# Altium PCB PCB6.PcbDoc
Units mm, origin at the board's own origin, x right, y up, seen from the top; angles counter-clockwise.
Board outline 62.8 x 34.79 mm, 2 copper layers (Top Layer, Bottom Layer); 14 components, 12 nets, 43 pads, 4 vias.
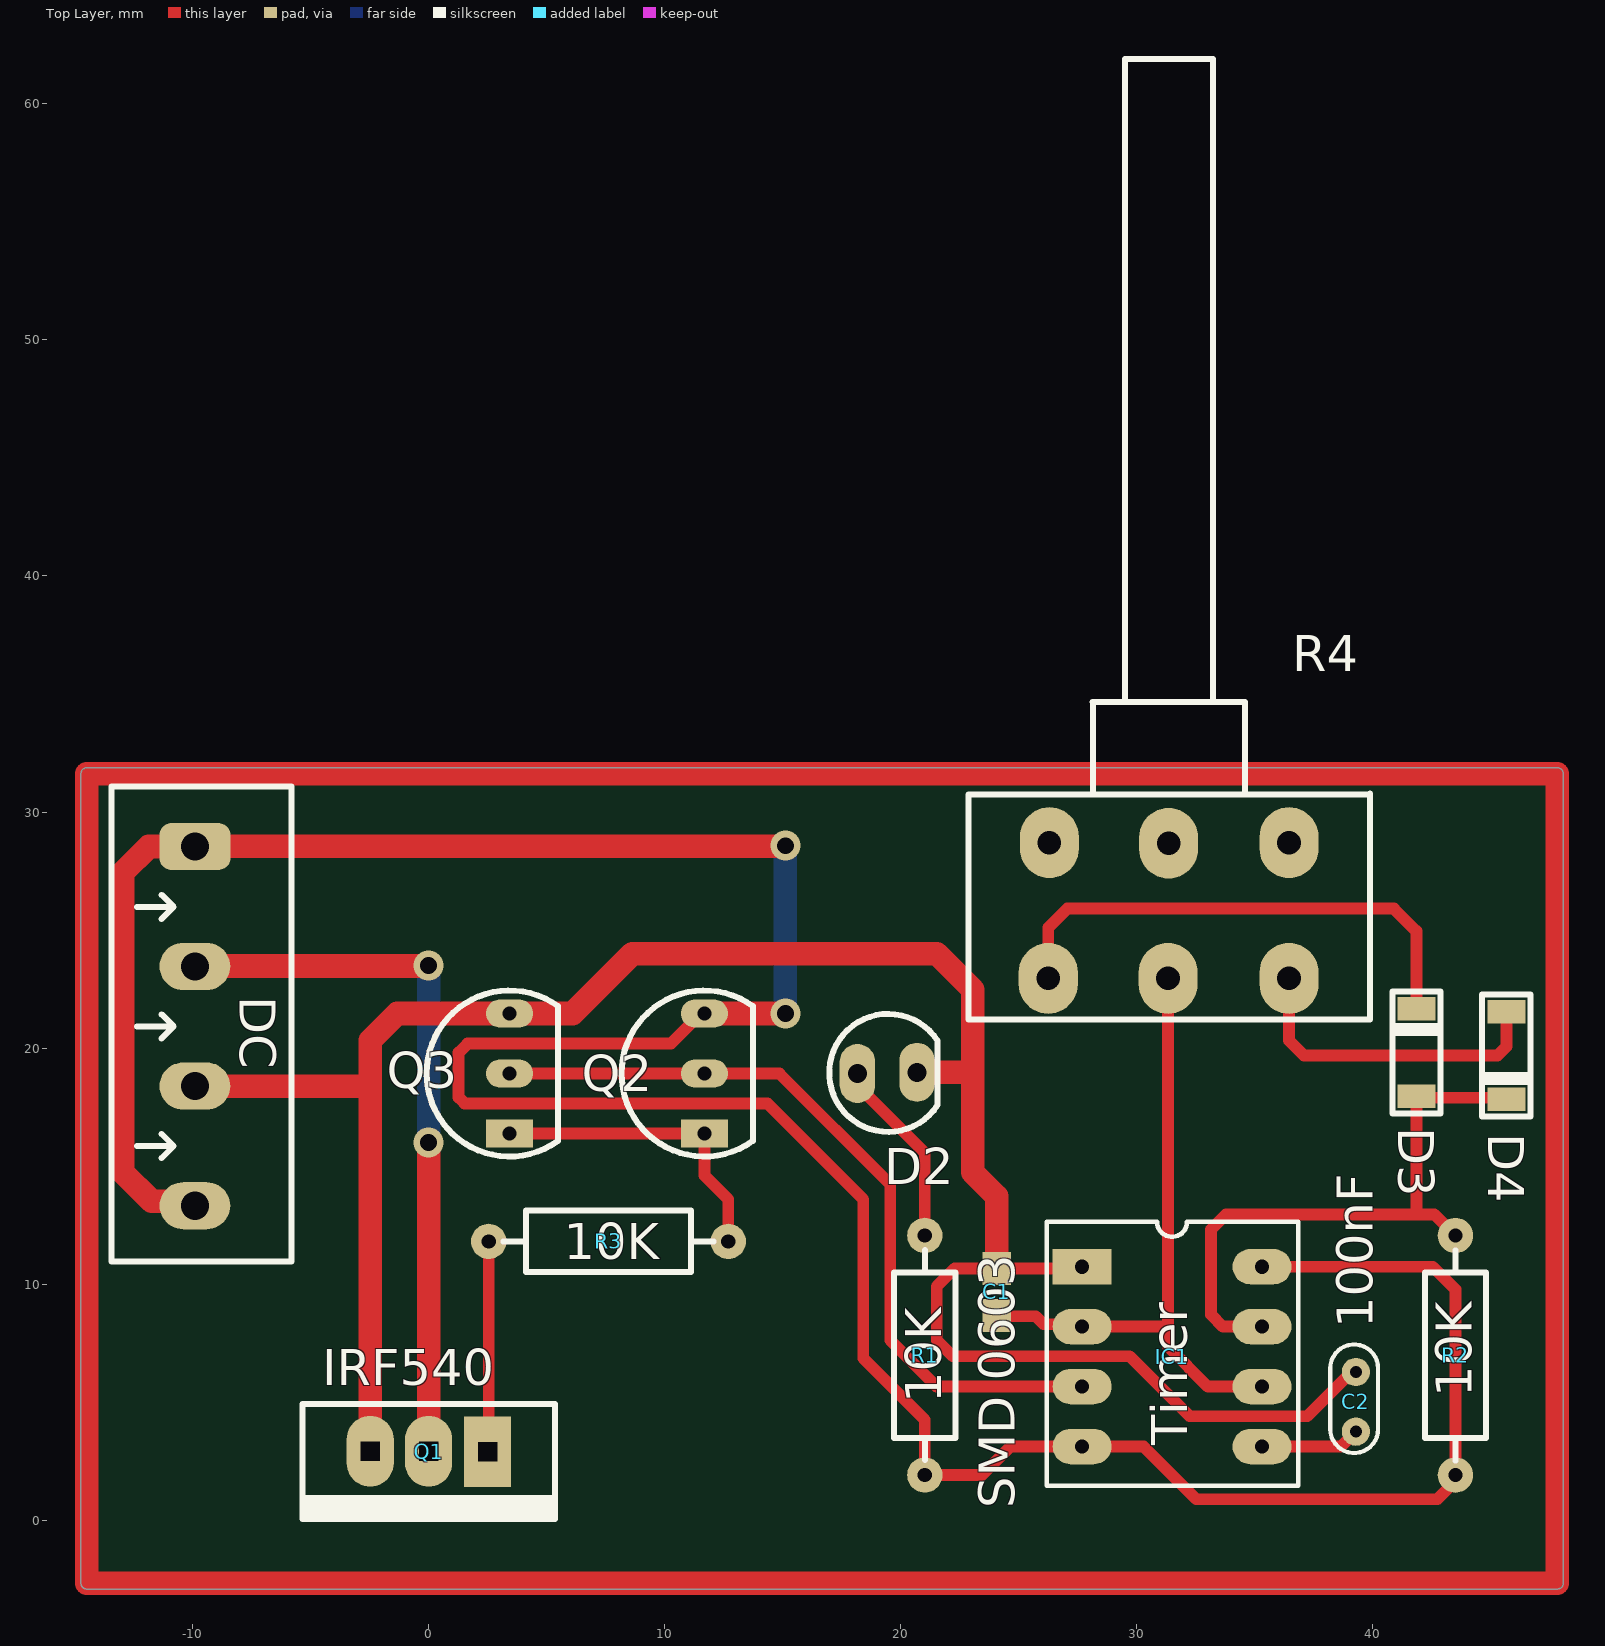
[diagram p0: Top Layer view]
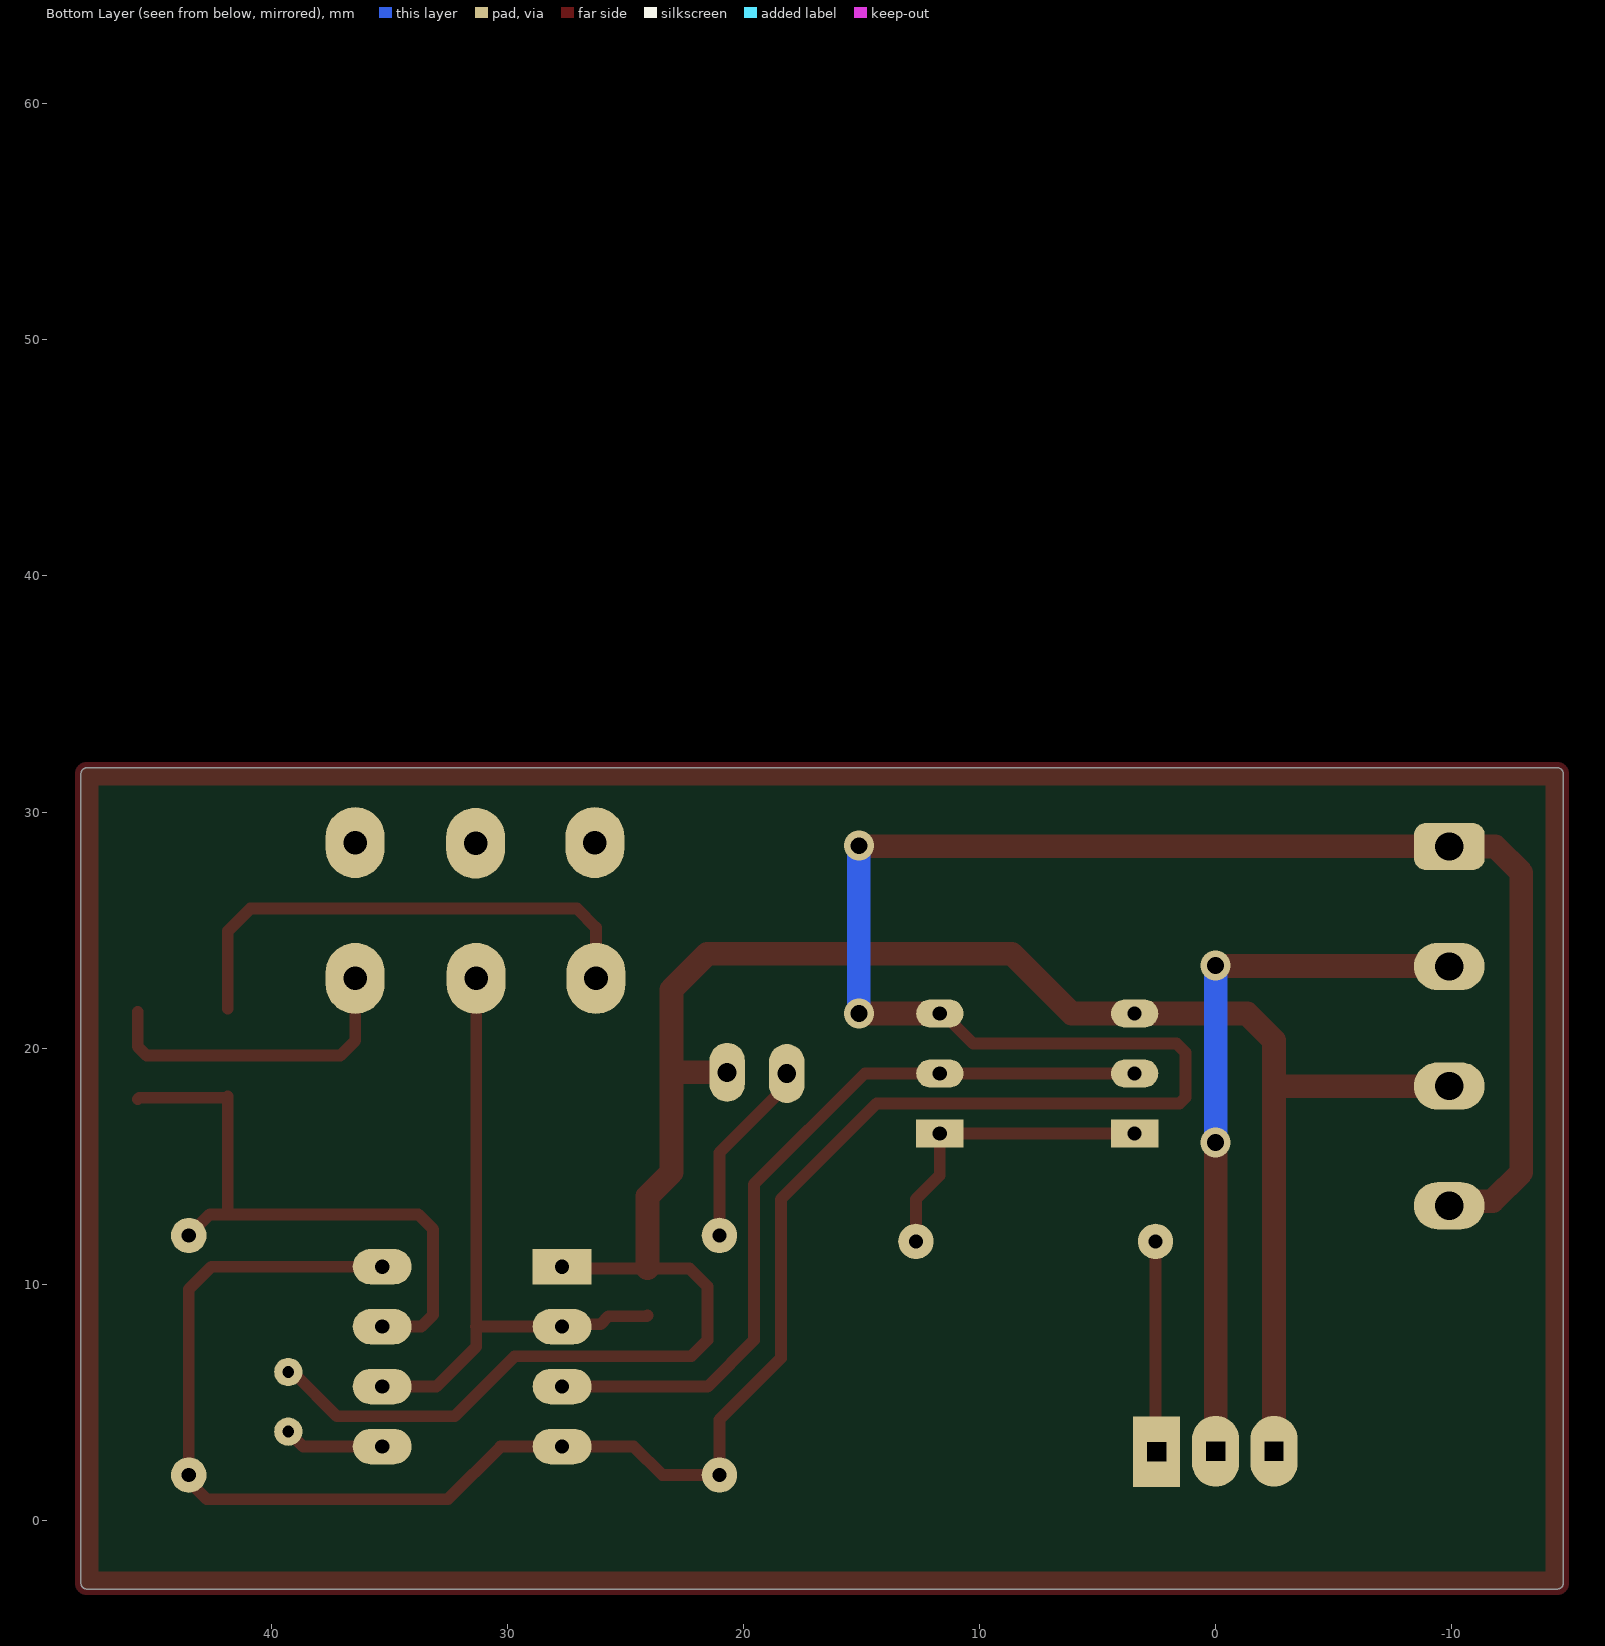
[diagram p1: Bottom Layer view, seen from below]
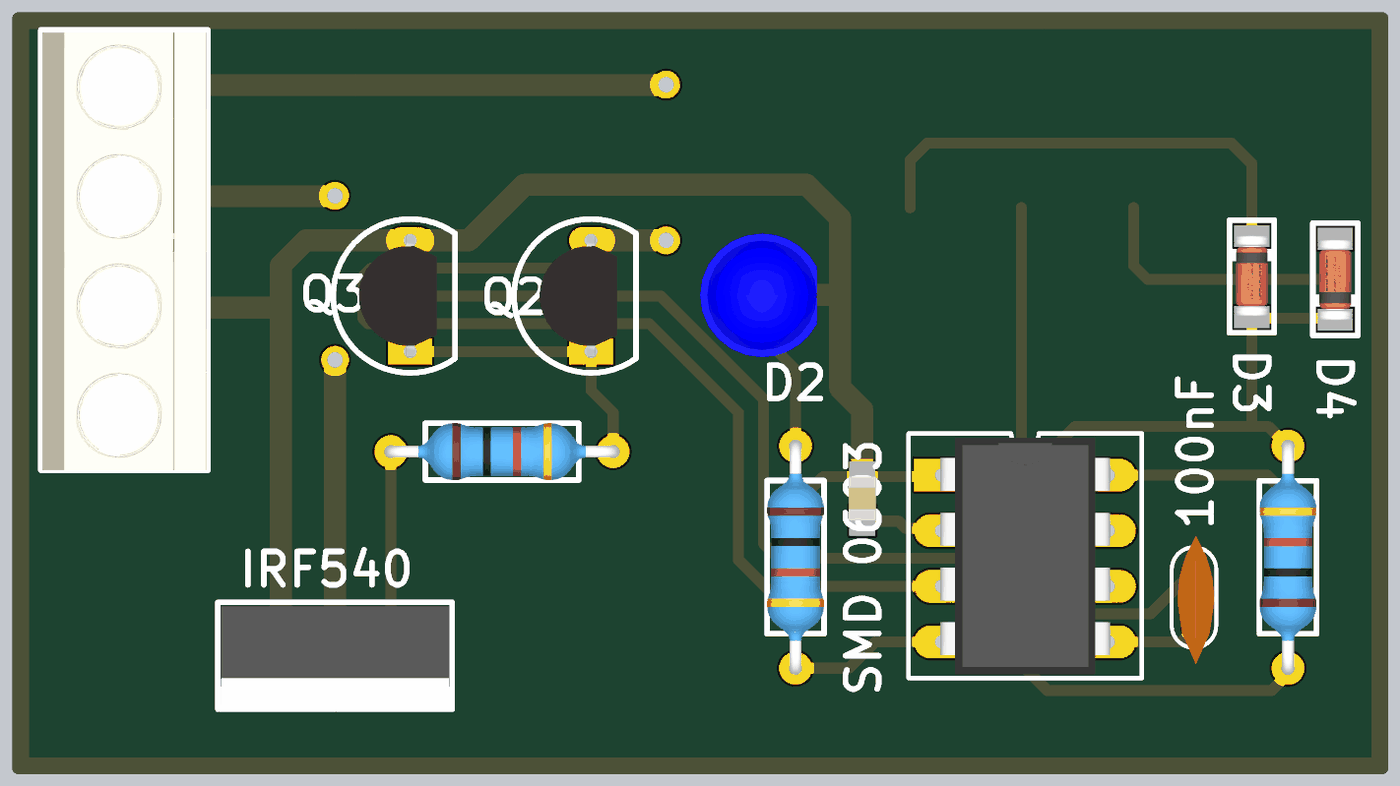
[diagram p2: 3D render of the assembled board from above, using the file's embedded part models]

## Layer stack, top to bottom
Top Solder: solder mask 0.0102, Solder Resist, Dk 3.5
Top Layer: signal copper 0.0356
Dielectric 1: dielectric 0.32, FR-4, Dk 4.8
Bottom Layer: signal copper 0.0356
Bottom Solder: solder mask 0.0102, Solder Resist, Dk 3.5

## Board outline
-14.728,-2.667 ccw(c-14.478,-2.667) -14.478,-2.917 47.817,-2.917 ccw(c47.817,-2.667) 48.067,-2.667 48.067,31.623 ccw(c47.817,31.623) 47.817,31.873 -14.478,31.873 ccw(c-14.478,31.623) -14.728,31.623

## Design rules (kind name [scope] priority, off if disabled: settings)
Clearance [All] p1: gap=0.254 ignorepadtopadclearanceinfootprint=FALSE except(0: Arc-Hole Track-Hole SMDPad-Hole THPad-Hole Via-Hole Fill-Hole Poly-Hole Region-Hole Text-Hole)
PolygonConnect [All] p1: connectstyle=Relief reliefconductorwidth=0.254 reliefentries=4 polygonreliefangle="90 Angle" airgapwidth=0.254
RoutingVias [All] p1: holewidth=0.711 width=1.27 viastyle="Through Hole" minholewidth=0.711 minwidth=1.27 maxholewidth=0.711 maxwidth=1.27
SolderMaskExpansion [All] p1: expansion=0.102
Width [All] p1: maxlimit=1.5 minlimit=0.254 preferedwidth=0.254
30 further rules are at their usual default settings.

## Components (designator, comment, footprint, x,y, rotation, side; value= is the part's Value field where it differs from the comment)
C1 "SMD 0603" "SMD CAPACITOR0805" 24.093,9.668 r270 top
C2 "100nF" CN5 39.308,4.953 r270 top
D2 "5mm" "LED 5mm BLUE" 19.466,18.923 r0 top
D3 "1N4148" SOD-80 41.848,19.812 r90 top
D4 "1N4148" SOD-80 45.658,19.685 r270 top
DC "Header 4" "HEADER 4" -9.779,20.955 r270 top
IC1 "Timer" DIP8 31.434,7.239 r0 top
Q1 "IRF540" TO220A -0.025,2.946 r180 top
Q2 "S8050" TO-92 11.684,18.923 r90 top
Q3 "S8550" TO-92 3.429,18.923 r90 top
R1 "10K" RES-0.25W-H-MF 21.02,6.99 r270 top
R2 "10K" RES-0.25W-H-MF 43.499,6.985 r90 top
R3 "10K" RES-0.25W-H-MF 7.62,11.811 r0 top
R4 "10K" VOLUME2 31.499,40.027 r180 top

## Footprints (in the part's own frame and the unit in brackets; to place one, negate y for a bottom-side part, rotate by r counter-clockwise, add the part's x,y. Pads: shape width x height; smd on the part's side, far side on the other; paste and mask are expansions set on the pad)
CN5 [mm]
  round 1.2 hole 0.5: 1(-1.325,-0.025) 2(1.2,-0.025)
  silkscreen extent -2.49,-1.12 2.1,0.92, body extent -3,-0.86 2.84,0.83, height 6.73
DIP8 [mm]
  rect 2.5x1.5 hole 0.6: 1(-3.75,3.5)
  oval 2.5x1.5 hole 0.6: 2(-3.75,0.96) 3(-3.75,-1.58) 4(-3.75,-4.12) 5(3.87,-4.12) 6(3.87,-1.58) 7(3.87,0.96) 8(3.87,3.5)
  silkscreen extent -5.25,-5.77 5.4,5.4, body extent -3.81,-5.6 3.96,5.2, height 4.5
"HEADER 4" [mm]
  rrect50% 2x3 hole 1.2: 1(-7.583,-0.12)
  oval 2x3 hole 1.2: 2(-2.503,-0.12) 3(2.564,-0.12) 4(7.632,-0.12)
  silkscreen extent -10.12,-3.65 9.99,3.97, body extent -10.01,-3.58 9.99,3.92, height 10
"LED 5mm BLUE" [mm]
  oval 1.5x2.5 hole 0.8: 1(-1.3,0) 2(1.225,0.05)
  silkscreen extent -2.49,-2.47 2.09,2.52, body extent -2.8,-2.79 2.52,2.85, height 8
RES-0.25W-H-MF [mm]
  round 1.5 hole 0.6: 1(-5.075,0) 2(5.075,0)
  silkscreen extent -4.45,-1.3 4.45,1.3, body extent -5.35,-1.3 5.36,1.3, height 2.69
"SMD CAPACITOR0805" [mm]
  rect 1.4x1.2 smd: 1(-1,-0.025) 2(1,-0.025)
  body extent -1,-0.65 1,0.6, height 0.3
SOD-80 [mm]
  rect 1x1.6 smd: 1(-1.85,0) 2(1.85,0)
  silkscreen extent -2.58,-1.02 2.58,1.02, body extent -1.82,-0.8 1.88,0.8, height 1.6
TO220A [mm]
  rect 2x3 hole 0.8 square: 1(-2.525,0.05)
  oval 2x3 hole 0.8 square: 2(-0.025,0.025) 3(2.45,0.025)
  silkscreen extent -5.38,-1.97 5.37,2.9, body extent -5.23,-1.8 5.17,2.7, height 20
TO-92 [mm]
  rect 1.2x2 hole 0.6: 1(-2.54,0)
  oval 1.2x2 hole 0.6: 2(0,0) 3(2.54,0)
  silkscreen extent -3.51,-2.05 3.51,3.52, body extent -2.77,-1.21 2.77,2.35, height 7.58
VOLUME2 [mm]
  oval 2.5x3 hole 1: 1(-4.95,17.075) 2(0.175,17.075) 3(5.25,17.075) 4(5.2,11.325) 5(0.15,11.35) 6(-4.95,11.325)
  silkscreen extent -8.38,-21.88 8.62,18.82, body extent -8.38,-22.03 8.62,18.82, height 21.2

## Part data
C1: library part "CAP SMD"
C2: library part "CN 33pF", LatestRevisionDate=17-Jul-2002, LatestRevisionNote="Re-released for DXP Platform.", PackageDescription="Radial Cap, Thru-Hole; 2 Leads; 0.3 in Pin Spacing", PackageReference=RAD-0.3, Published=8-Jun-2000, Publisher="Altium Limited"
D2: library part "LED 5mm"
D3 D4: library part "Diode 1N4148"
IC1: library part 555
Q2: library part S8050-TO92
Q3: library part S8550-TO92
R1 R2 R3: library part "Resistors THD"
R4: library part "Res Variable"

## Via types
v1: diameter 1.27, hole 0.711, Top Layer to Bottom Layer, 4 vias

## Nets (pads, with @x,y where several pads share a name; then routed paths per layer and width w, separated by ;. In a path a pad name is that pad's centre, name@x,y a point inside that pad or via, vN(x,y) a via of type N, cw(c..) or ccw(c..) an arc to the next point about the centre after c; other vN are vias at no path point)
GND: C1.1 C2.1 D2.2 DC.3 IC1.1 Q1.3 Q3.3 | length 96
  Top Layer w0.5: IC1.1 27.613,10.668 C1.1 22.29,10.668 21.528,9.906 21.528,7.62 22.203,6.945 29.696,6.945 32.236,4.405 37.16,4.405 37.224,4.405 C2.1@39.042,6.223 ; C2.1@39.042,6.223 39.097,6.278 C2.1 39.228,6.223 C2.1@39.042,6.223
  Top Layer w1: DC.3 -2.475,18.391 ; Q1.3 -2.475,18.391 ; D2.2 23.002,18.973 23.052,18.923 ; C1.1 24.068,13.716 23.052,14.732 23.052,18.923 ; -2.475,18.391 -2.475,20.32 -1.332,21.463 Q3.3 6.096,21.463 8.636,24.003 21.528,24.003 23.052,22.479 23.052,18.923
NetC1_2: C1.2 IC1.2 IC1.6 R4.2 | length 27.8
  Top Layer w0.5: C1.2 24.1,8.636 25.719,8.636 26.053,8.302 27.684,8.302 27.787,8.199 31.324,8.199 ; R4.2 31.324,8.199 ; 31.344,8.199 31.324,8.199 ; IC1.6 33.014,5.659 31.324,7.349 31.324,8.199
NetC2_2: C2.2 IC1.5 | length 4.2
  Top Layer w0.5: IC1.5 38.649,3.119 C2.2
NetD2_1: D2.1 R1.1 | length 8
  Top Layer w0.5: D2.1 18.166,18.423 21.02,15.569 R1.1
NetD3_1: D3.1 D4.2 IC1.7 R2.2 | length 25.8
  Top Layer w0.5: IC1.7 33.649,8.199 33.148,8.7 33.148,12.32 33.782,12.954 41.848,12.954 ; R2.2 42.605,12.954 41.848,12.954 ; D4.2 45.594,17.899 41.911,17.899 D3.1 41.848,12.954
NetD3_2: D3.2 R4.3 | length 21.8
  Top Layer w0.5: R4.3 26.249,25.106 27.051,25.908 40.894,25.908 41.848,24.954 D3.2
NetD4_1: D4.1 R4.1 | length 13.7
  Top Layer w0.5: R4.1 36.449,20.32 37.084,19.685 45.277,19.685 45.658,20.066 D4.1
NetDC_2: DC.2 Q1.2 | length 30.5
  Top Layer w1: DC.2 -9.881,23.476 -0.019,23.476 v1(0,23.495) ; Q1.2 v1(0,16.002)
  Bottom Layer w1: v1(0,16.002) v1(0,23.495)
NetIC1_3: IC1.3 Q2.2 Q3.2 | length 33.6
  Top Layer w0.5: Q3.2 Q2.2 14.859,18.923 19.558,14.224 19.558,7.62 21.519,5.659 IC1.3
NetQ1_1: Q1.1 R3.1 | length 8.9
  Top Layer w0.5: Q1.1 2.545,2.941 R3.1
NetQ2_1: Q2.1 Q3.1 R3.2 | length 13.2
  Top Layer w0.5: Q3.1 Q2.1 11.684,14.605 12.695,13.594 R3.2
VCC: DC.1 DC.4 IC1.4 IC1.8 Q2.3 R1.2 R2.1 | length 141
  Top Layer w0.5: Q2.3 11.534,21.463 10.264,20.193 1.651,20.193 1.27,19.812 1.27,17.907 1.524,17.653 14.351,17.653 18.415,13.589 18.415,6.858 21.02,4.253 R1.2 23.443,1.915 24.647,3.119 IC1.4 30.291,3.119 32.521,0.889 42.737,0.889 43.499,1.651 R2.1 43.499,9.779 42.539,10.739 IC1.8
  Top Layer w1: DC.4 -10.09,13.515 -11.737,13.515 -12.954,14.732 -12.954,27.432 -11.848,28.538 DC.1 -9.881,28.556 15.094,28.556 v1(15.113,28.575) ; Q2.3 v1(15.113,21.463)
  Bottom Layer w1: v1(15.113,21.463) v1(15.113,28.575)
pads on no net: R4.4 R4.5 R4.6
copper on no net: | length 193.2
  Top Layer w1: -14.478,-2.667 -14.478,31.623 47.817,31.623 47.817,-2.667 -14.478,-2.667

## Silkscreen, mask and mechanical layers (free items; w line width, h text height)
Top Overlay:
  lines w0.254: -0.081,0.127 0,0.046